# EAGLE board eBike Controller (EAGLE 6.4)

Size 79.74 x 82.6 mm. Coordinates in mm from the lower left corner, seen from the top.
Outline: 0,0 79.74,0 79.74,82.6 0,82.6 0,0
Copper layers (1*16): Top 0.035mm / dielectric 1.5mm / Bottom 0.035mm
Design rules "default": minimum track width 10mil, minimum drill 24mil, track to track 8mil, track to pad 8mil, pad to pad 8mil, via to via 8mil, smd to smd 8mil, copper to edge 40mil, drill to drill 8mil, minimum pad ring 10mil, minimum via ring 8mil, stop-mask expansion 4mil, vias tented up to drill 0mil, thermal gap 10mil

## Footprints (pad centres in the part's own frame; a part is rotated, then mirrored left to right if it is on the bottom)
TO220V = drill 1.016 long: 1 -2.54,-2.54; 2 0,-2.54; 3 2.54,-2.54
OPEN-BLDC_SO8 = smd 0.65 x 1.75: 1 -1.905,-2.8; 2 -0.635,-2.8; 3 0.635,-2.8; 4 1.905,-2.8; 5 1.905,2.8; 6 0.635,2.8; 7 -0.635,2.8; 8 -1.905,2.8

## Placement (x,y rotation side)
Q1  [TO220V]  67.95,76.96 270 top
Q2  [TO220V]  61.34,76.96 270 top
Q3  [TO220V]  54.74,76.96 270 top
Q4  [TO220V]  48.13,76.96 270 top
Q5  [TO220V]  41.53,76.96 270 top
Q6  [TO220V]  34.92,76.96 270 top
Q7  [TO220V]  68.07,64.52 270 top
Q8  [TO220V]  61.47,64.52 270 top
Q9  [TO220V]  54.86,64.52 270 top
Q10  [TO220V]  48.26,64.52 270 top
Q11  [TO220V]  41.66,64.52 270 top
Q12  [TO220V]  35.05,64.52 270 top
Q13  [TO220V]  68.2,45.72 270 top
Q14  [TO220V]  61.6,45.72 270 top
Q15  [TO220V]  54.99,45.72 270 top
Q16  [TO220V]  48.39,45.72 270 top
Q17  [TO220V]  41.78,45.72 270 top
Q18  [TO220V]  35.18,45.72 270 top
Q19  [TO220V]  68.2,33.53 270 top
Q20  [TO220V]  61.6,33.53 270 top
Q21  [TO220V]  54.99,33.53 270 top
Q22  [TO220V]  48.39,33.53 270 top
Q23  [TO220V]  41.78,33.53 270 top
Q24  [TO220V]  35.18,33.53 270 top
Q25  [TO220V]  68.45,17.65 270 top
Q26  [TO220V]  61.85,17.65 270 top
Q27  [TO220V]  55.24,17.65 270 top
Q28  [TO220V]  48.64,17.65 270 top
Q29  [TO220V]  42.04,17.65 270 top
Q30  [TO220V]  35.43,17.65 270 top
Q31  [TO220V]  68.58,5.59 270 top
Q32  [TO220V]  61.98,5.59 270 top
Q33  [TO220V]  55.37,5.59 270 top
Q34  [TO220V]  48.77,5.59 270 top
Q35  [TO220V]  42.16,5.59 270 top
Q36  [TO220V]  35.56,5.59 270 top
U1  OPEN-BLDC_BD_IR2101  [OPEN-BLDC_SO8]  20.57,70.48 270 top
U2  OPEN-BLDC_BD_IR2101  [OPEN-BLDC_SO8]  21.21,39.5 270 top
U3  OPEN-BLDC_BD_IR2101  [OPEN-BLDC_SO8]  22.35,11.94 270 top

## Library data of the parts
Q1-Q36 = adafruit
U1-U3 = power_control

## Nets
BAT+: Q1.2 Q2.2 Q3.2 Q4.2 Q5.2 Q6.2 Q13.2 Q14.2 Q15.2 Q16.2 Q17.2 Q18.2 Q25.2 Q26.2 Q27.2 Q28.2 Q29.2 Q30.2
N$1: Q1.3 Q2.3 Q3.3 Q4.3 Q5.3 Q6.3 Q7.2 Q8.2 Q9.2 Q10.2 Q11.2 Q12.2
N$2: Q7.3 Q8.3 Q9.3 Q10.3 Q11.3 Q12.3
N$3: Q7.1 Q8.1 Q9.1 Q10.1 Q11.1 Q12.1 U1.5
N$4: Q1.1 Q2.1 Q3.1 Q4.1 Q5.1 Q6.1 U1.7
N$6: Q13.3 Q14.3 Q15.3 Q16.3 Q17.3 Q18.3 Q19.2 Q20.2 Q21.2 Q22.2 Q23.2 Q24.2
N$7: Q13.1 Q14.1 Q15.1 Q16.1 Q17.1 Q18.1 U2.7
N$8: Q19.1 Q20.1 Q21.1 Q22.1 Q23.1 Q24.1 U2.5
N$9: Q25.1 Q26.1 Q27.1 Q28.1 Q29.1 Q30.1 U3.7
N$10: Q31.1 Q32.1 Q33.1 Q34.1 Q35.1 Q36.1 U3.5
N$12: Q19.3 Q20.3 Q21.3 Q22.3 Q23.3 Q24.3
N$14: Q25.3 Q26.3 Q27.3 Q28.3 Q29.3 Q30.3 Q31.2 Q32.2 Q33.2 Q34.2 Q35.2 Q36.2
N$20: Q31.3 Q32.3 Q33.3 Q34.3 Q35.3 Q36.3

## Tracks (layer width: path | path; a pad name or v marks a point on that pad's centre or on a via)
BAT+  (17 unrouted)
N$1  (11 unrouted)
N$2  (5 unrouted)
N$3  (6 unrouted)
N$4  (6 unrouted)
N$6  (11 unrouted)
N$7  (6 unrouted)
N$8  (6 unrouted)
N$9  (6 unrouted)
N$10  (6 unrouted)
N$12  (5 unrouted)
N$14  (11 unrouted)
N$20  (5 unrouted)
(copper drawn outside any net)
  shapes: Bottom area x2